# Altium PCB COREV1.1_pcb5_0.PcbDoc (part 10 of 14)
Units mil, origin at the board's own origin, x right, y up, seen from the top; angles counter-clockwise.
Board outline 2860 x 2420 mil, 6 copper layers (Top Layer, GND, SIGNAL_1, SIGNAL_2, POWER, Bottom Layer); 110 components, 241 nets, 882 pads, 697 vias.
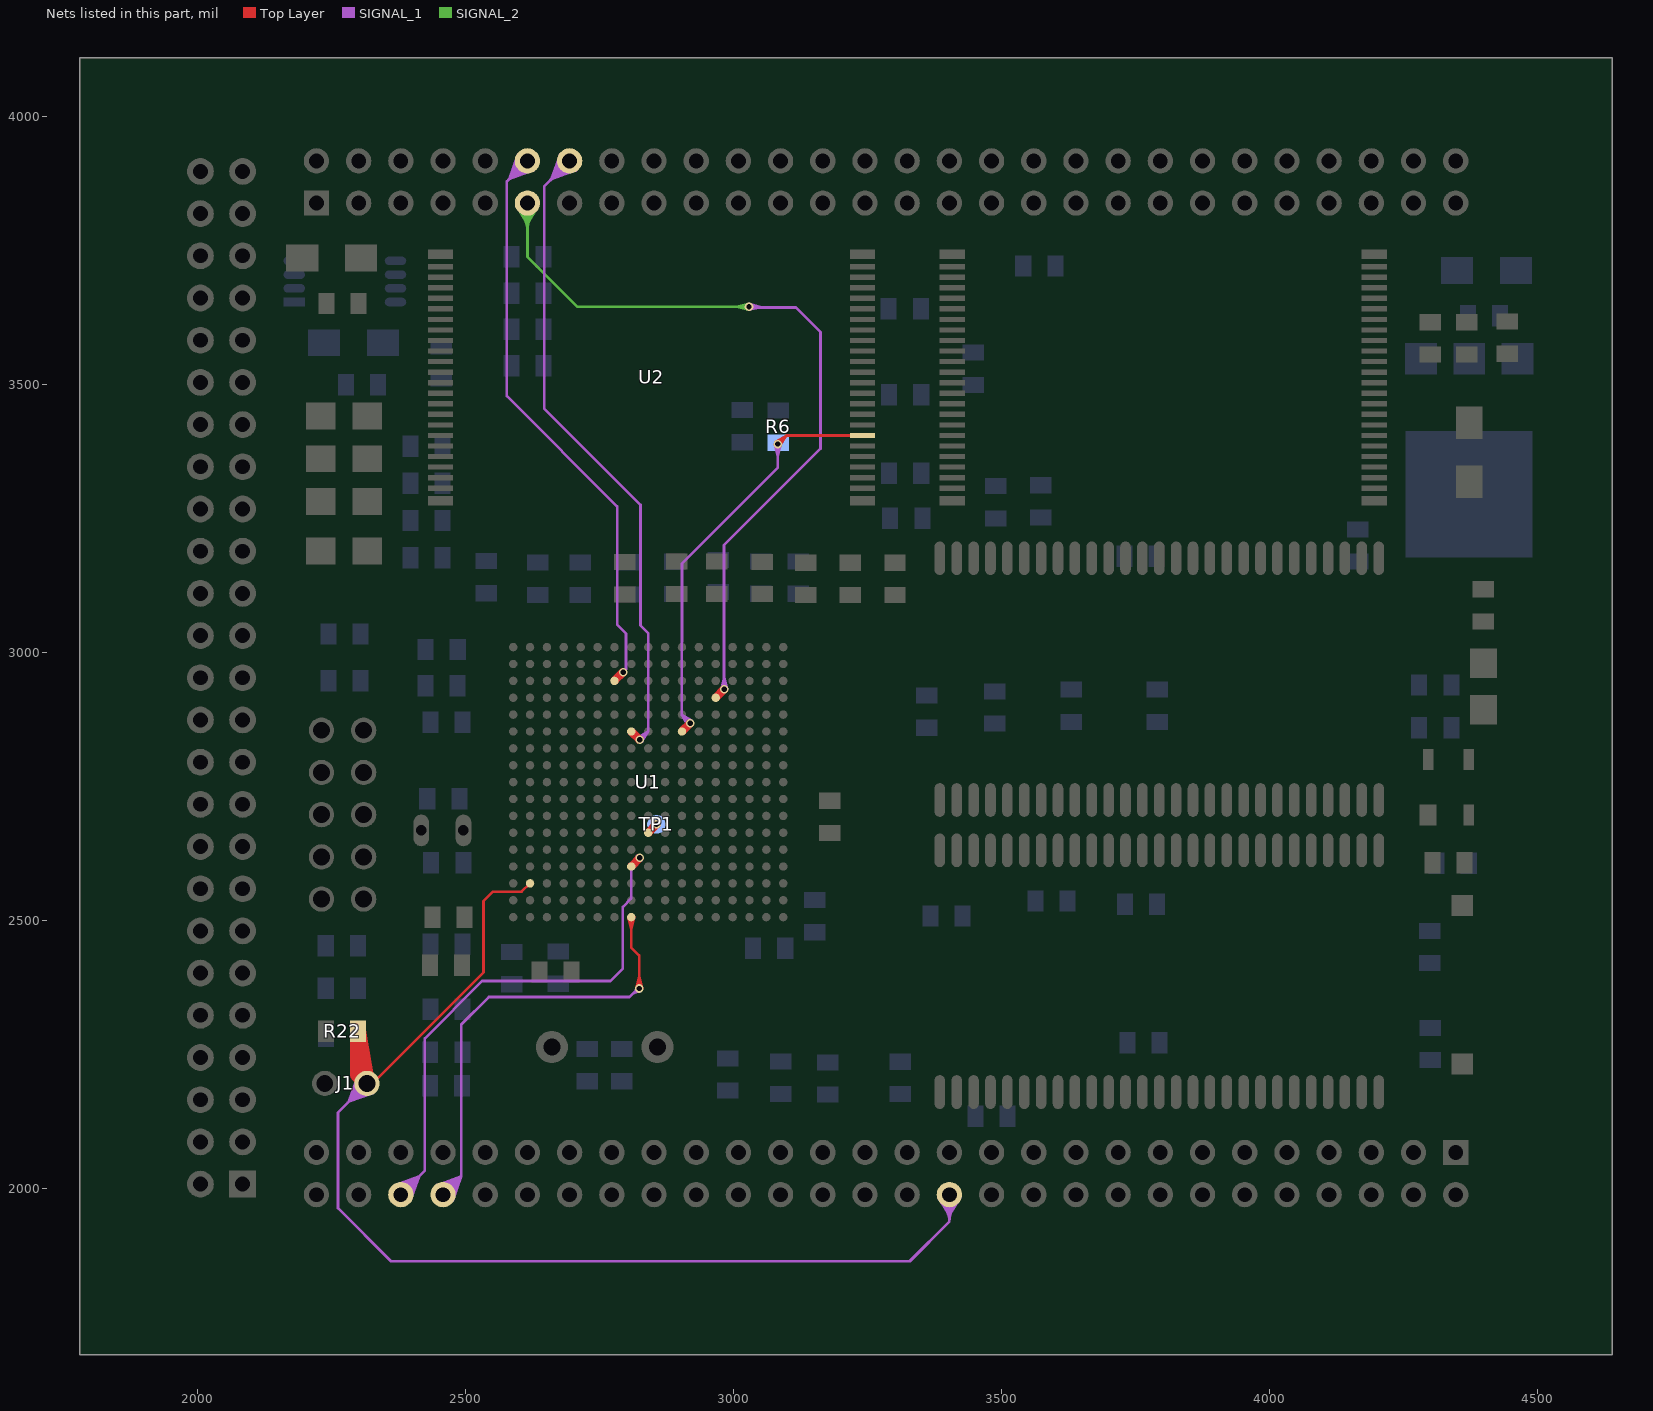
[diagram p14: the nets of this part, all layers, seen from the top]

## Via types
v1: diameter 16, hole 10, Top Layer to Bottom Layer, tented both sides, 638 vias
v2: diameter 30, hole 18, Top Layer to Bottom Layer, tented both sides, 56 vias
v3: diameter 16, hole 10, Top Layer to Bottom Layer, 2 vias
v4: diameter 30, hole 16, Top Layer to Bottom Layer, tented both sides, 1 vias

## Nets (pads, with @x,y where several pads share a name; then routed paths per layer and width w, separated by ;. In a path a pad name is that pad's centre, name@x,y a point inside that pad or via, vN(x,y) a via of type N, cw(c..) or ccw(c..) an arc to the next point about the centre after c; other vN are vias at no path point) (continued)
NWAIT: pad.PC11 U1.E4 | length 2471.3
  Top Layer w5: U1.E4@2966.87,2920.99 ccw(c2966.87,2933.96) 2976.04,2924.79 ccw(c2985.22,2915.61) U1.E4@2972.24,2915.61 ; 2972.93,2921.67 ccw(c2963.1,2931.5) v1@2977,2931.5 ; 2973.55,2922.29 cw(c2982.5,2913.34) v1@2982.5,2926 ; v1@2977.46,2933.7 U1.E4@2971.1,2912.3 ; v1@2978.13,2934.84 U1.E4@2966.87,2915.61 ; v1@2979.06,2935.79 U1.E4@2963.56,2919.85 ; v1@2984.78,2926.5 U1.E4@2963.56,2919.85 ; v1@2985.91,2927.19 U1.E4@2966.87,2915.61 ; v1@2986.85,2928.13 U1.E4@2971.1,2912.3 ; U1.E4@2963.56,2919.85 v1@2982.5,2931.24 ; U1.E4@2963.56,2919.85 v1(2982.5,2931.5) ; U1.E4@2966.87,2915.61 v1@2982.5,2931.24 ; U1.E4@2966.87,2915.61 v1(2982.5,2931.5) ; U1.E4@2971.1,2912.3 v1@2982.5,2931.24 ; U1.E4@2971.1,2912.3 v1(2982.5,2931.5) ; v1@2982.5,2931.24 v1(2982.5,2931.5)
  SIGNAL_1 w5: v1@2977.04,2932.16 2982.5,2954.5 v1@2987.96,2932.16 ; v1@2978.61,2935.39 ccw(c2969.22,2944.78) 2982.5,2944.78 ccw(c2995.78,2944.78) v1@2986.39,2935.39 ; v1@2982.76,2931.5 v1(2982.5,2931.5) 2982.5,3200.5 3162.5,3380.5 3162.5,3598 3116.5,3644 3030,3644 v1(3029,3645) 3052.06,3644 ; v1@3029.42,3639.52 3052.06,3644 ; v1@3029.89,3650.43 3052.06,3644 ; v1@3032.89,3641.11 cw(c3039.86,3634.14) 3039.86,3644 ; v1@3032.89,3648.89 ccw(c3044.69,3660.69) 3044.69,3644
  SIGNAL_2 w5: pad.PC11@2595.18,3832.93 2615.5,3800.09 ; pad.PC11@2599.73,3835.34 2615.5,3800.09 ; pad.PC11@2600.56,3823.77 cw(c2564.5,3787.72) 2615.5,3787.72 cw(c2666.49,3787.72) pad.PC11@2630.43,3823.77 ; pad.PC11@2604.1,3827.31 cw(c2576.57,3799.79) 2615.5,3799.79 cw(c2654.42,3799.79) pad.PC11@2626.9,3827.31 ; pad.PC11@2604.49,3837.11 2615.5,3800.09 ; pad.PC11@2607.63,3830.84 cw(c2588.65,3811.86) 2615.5,3811.86 cw(c2642.35,3811.86) pad.PC11@2623.36,3830.84 ; pad.PC11@2609.39,3838.22 2615.5,3800.09 ; pad.PC11@2615.5,3838.71 2615.5,3738.5 2709,3645 v1(3029,3645) ; pad.PC11@2621.6,3838.22 2615.5,3800.09 ; pad.PC11@2626.5,3837.11 2615.5,3800.09 ; pad.PC11@2631.26,3835.34 2615.5,3800.09 ; pad.PC11@2635.81,3832.93 2615.5,3800.09 ; v1@3025.11,3641.11 ccw(c3015.72,3631.72) 3015.72,3645 ccw(c3015.72,3658.28) v1@3025.11,3648.89 ; v1@3028.34,3639.54 3006,3645 v1@3028.34,3650.46
NXDACK0: pad.PC12 U1.L3 | length 1953.5
  Top Layer w5: U1.L3@2777.89,2952.48 ccw(c2777.89,2965.46) 2787.07,2956.28 ccw(c2796.24,2947.11) U1.L3@2783.27,2947.11 ; 2784.41,2953.63 ccw(c2774.54,2963.5) v1@2788.5,2963.5 ; 2785.1,2954.31 cw(c2794,2945.41) v1@2794,2958 ; v1@2788.98,2965.76 U1.L3@2782.12,2943.78 ; v1@2789.64,2966.86 U1.L3@2777.89,2947.11 ; v1@2790.54,2967.78 U1.L3@2774.57,2951.33 ; v1@2796.34,2958.52 U1.L3@2774.57,2951.33 ; v1@2797.43,2959.2 U1.L3@2777.89,2947.11 ; v1@2798.34,2960.12 U1.L3@2782.12,2943.78 ; U1.L3@2774.57,2951.33 v1@2794,2963.22 ; U1.L3@2774.57,2951.33 v1(2794,2963.5) ; U1.L3@2777.89,2947.11 v1@2794,2963.22 ; U1.L3@2777.89,2947.11 v1(2794,2963.5) ; U1.L3@2782.12,2943.78 v1@2794,2963.22 ; U1.L3@2782.12,2943.78 v1(2794,2963.5)
  SIGNAL_1 w5: pad.PC12@2594.37,3917.45 cw(c2543.38,3917.45) 2579.44,3881.39 cw(c2615.5,3845.33) pad.PC12@2615.5,3896.33 ; pad.PC12@2597.66,3928.77 2581.27,3883.22 ; pad.PC12@2599.37,3917.45 cw(c2560.45,3917.45) 2587.97,3889.93 cw(c2615.5,3862.4) pad.PC12@2615.5,3901.33 ; pad.PC12@2602.36,3926.79 2581.27,3883.22 ; pad.PC12@2604.37,3917.45 cw(c2577.52,3917.45) 2596.51,3898.46 cw(c2615.5,3879.48) pad.PC12@2615.5,3906.33 ; pad.PC12@2606.78,3924.36 2581.27,3883.22 ; pad.PC12@2610.9,3921.49 2581.27,3883.22 ; pad.PC12@2615.5,3917.45 2577,3878.95 2577,3505 2576.98,3478.52 2783,3272.5 2783,3051.94 2799.5,3035.44 2799.5,2969 v1(2794,2963.5) v1@2792.5,2965 ; pad.PC12@2619.54,3912.85 2581.27,3883.22 ; pad.PC12@2622.41,3908.73 2581.27,3883.22 ; pad.PC12@2624.84,3904.31 2581.27,3883.22 ; pad.PC12@2626.81,3899.61 2581.27,3883.22
NXDREQ0: pad.PC14 U1.K6 | length 2129.6
  Top Layer w5: U1.K6@2809.39,2847.25 cw(c2809.39,2834.27) 2818.56,2843.45 cw(c2827.74,2852.62) U1.K6@2814.76,2852.62 ; v1@2819.51,2837 ccw(c2806.23,2837) 2815.62,2846.39 ccw(c2825.01,2855.78) v1@2825.01,2842.5 ; v1@2819.98,2834.77 U1.K6@2813.62,2855.93 ; v1@2820.67,2833.63 U1.K6@2809.39,2852.62 ; v1@2821.61,2832.68 U1.K6@2806.08,2848.39 ; v1@2827.24,2842.03 U1.K6@2806.08,2848.39 ; v1@2828.39,2841.34 U1.K6@2809.39,2852.62 ; v1@2829.34,2840.4 U1.K6@2813.62,2855.93 ; U1.K6@2806.08,2848.39 v1(2825.01,2837) ; U1.K6@2806.08,2848.39 v1(2825.01,2837) ; U1.K6@2809.39,2852.62 v1(2825.01,2837) ; U1.K6@2809.39,2852.62 v1(2825.01,2837) ; U1.K6@2813.62,2855.93 v1(2825.01,2837) ; U1.K6@2813.62,2855.93 v1(2825.01,2837)
  SIGNAL_1 w5: pad.PC14@2673.11,3917.45 cw(c2622.12,3917.45) 2658.18,3881.39 cw(c2694.24,3845.33) pad.PC14@2694.24,3896.33 ; pad.PC14@2676.4,3928.77 2660.01,3883.22 ; pad.PC14@2678.11,3917.45 cw(c2639.19,3917.45) 2666.71,3889.93 cw(c2694.24,3862.4) pad.PC14@2694.24,3901.33 ; pad.PC14@2681.1,3926.79 2660.01,3883.22 ; pad.PC14@2683.11,3917.45 cw(c2656.26,3917.45) 2675.25,3898.46 cw(c2694.24,3879.48) pad.PC14@2694.24,3906.33 ; pad.PC14@2685.52,3924.36 2660.01,3883.22 ; pad.PC14@2689.64,3921.49 2660.01,3883.22 ; pad.PC14@2694.24,3917.45 2646.62,3869.83 2646.62,3455.38 2826.5,3275.5 2826.5,3050.5 2840.77,3036.23 2840.77,2852.76 ; pad.PC14@2698.28,3912.85 2660.01,3883.22 ; pad.PC14@2701.14,3908.73 2660.01,3883.22 ; pad.PC14@2703.58,3904.31 2660.01,3883.22 ; pad.PC14@2705.55,3899.61 2660.01,3883.22 ; v1@2821.63,2841.34 2840.77,2852.76 ; v1(2825.01,2837) 2840.77,2852.76 ; v1@2825.01,2842.5 ccw(c2825.01,2855.78) 2834.4,2846.39 ccw(c2843.79,2837) v1@2830.51,2837 ; v1@2829.35,2833.62 2840.77,2852.76
OM0: J1.1 pad.PA26 R22.2 U1.T15 | length 45726.8
  Top Layer w5: J1.1@2316.05,2195.82 2326.24,2195.82 2533.5,2403.08 2533.5,2536 2551.28,2553.78 2604.78,2553.78 U1.T15@2620.41,2569.16
  Top Layer w30: R22.2@2299.5,2293.41 2299.5,2212.37 J1.1@2316.05,2195.82 ; R22.2@2299.5,2293.41 J1.1@2316.05,2195.82 ; R22.2@2299.5,2293.41 J1.1@2316.05,2195.82 ; R22.2@2299.5,2293.41 J1.1@2316.05,2195.82
  SIGNAL_1 w5: J1.1@2294.93,2195.82 cw(c2243.93,2195.82) 2279.99,2159.76 cw(c2316.05,2123.71) J1.1@2316.05,2174.7 ; J1.1@2299.93,2195.82 cw(c2261,2195.82) 2288.53,2168.3 cw(c2316.05,2140.78) J1.1@2316.05,2179.7 ; J1.1@2304.93,2195.82 cw(c2278.08,2195.82) 2297.06,2176.84 cw(c2316.05,2157.85) J1.1@2316.05,2184.7 ; pad.PA26@3382.58,1982.54 3402.9,1949.69 ; pad.PA26@3387.13,1984.95 3402.9,1949.69 ; pad.PA26@3388.08,1973.26 cw(c3353.29,1937.9) 3402.9,1937.9 ; pad.PA26@3391.59,1976.82 cw(c3365.03,1949.83) 3402.9,1949.83 cw(c3440.76,1949.83) pad.PA26@3414.21,1976.82 ; pad.PA26@3391.89,1986.71 3402.9,1949.69 ; pad.PA26@3395.1,1980.39 cw(c3376.78,1961.77) 3402.9,1961.77 cw(c3429.02,1961.77) pad.PA26@3410.7,1980.39 ; pad.PA26@3396.8,1987.83 3402.9,1949.69 ; pad.PA26@3402.9,1988.32 3402.9,1937.9 ; pad.PA26@3409,1987.83 3402.9,1949.69 ; pad.PA26@3413.9,1986.71 3402.9,1949.69 ; pad.PA26@3417.71,1973.26 ccw(c3452.51,1937.9) 3402.9,1937.9 ; pad.PA26@3418.66,1984.95 3402.9,1949.69 ; pad.PA26@3423.22,1982.54 3402.9,1949.69 ; 2281.82,2161.59 J1.1@2327.37,2177.99 ; 2281.82,2161.59 J1.1@2298.21,2207.14 ; 2281.82,2161.59 J1.1@2325.39,2182.68 ; 2281.82,2161.59 J1.1@2302.91,2205.16 ; 2281.82,2161.59 J1.1@2322.96,2187.11 ; 2281.82,2161.59 J1.1@2307.33,2202.73 ; 2281.82,2161.59 J1.1@2320.09,2191.23 ; 2281.82,2161.59 J1.1@2311.45,2199.87 ; 2281.82,2161.59 J1.1@2327.37,2177.99 ; 2281.82,2161.59 J1.1@2298.21,2207.14 ; 2281.82,2161.59 J1.1@2325.39,2182.68 ; 2281.82,2161.59 J1.1@2302.91,2205.16 ; 2281.82,2161.59 J1.1@2322.96,2187.11 ; 2281.82,2161.59 J1.1@2307.33,2202.73 ; 2281.82,2161.59 J1.1@2320.09,2191.23 ; 2281.82,2161.59 J1.1@2311.45,2199.87 ; 2281.82,2161.59 J1.1@2327.37,2177.99 ; 2281.82,2161.59 J1.1@2298.21,2207.14 ; 2281.82,2161.59 J1.1@2325.39,2182.68 ; 2281.82,2161.59 J1.1@2302.91,2205.16 ; 2281.82,2161.59 J1.1@2322.96,2187.11 ; 2281.82,2161.59 J1.1@2307.33,2202.73 ; 2281.82,2161.59 J1.1@2320.09,2191.23 ; 2281.82,2161.59 J1.1@2311.45,2199.87 ; 2281.82,2161.59 J1.1@2316.05,2195.82 ; 2281.82,2161.59 J1.1@2327.37,2177.99 ; 2281.82,2161.59 J1.1@2298.21,2207.14 ; 2281.82,2161.59 J1.1@2325.39,2182.68 ; 2281.82,2161.59 J1.1@2302.91,2205.16 ; 2281.82,2161.59 J1.1@2322.96,2187.11 ; 2281.82,2161.59 J1.1@2307.33,2202.73 ; 2281.82,2161.59 J1.1@2320.09,2191.23 ; 2281.82,2161.59 J1.1@2311.45,2199.87 ; 2281.82,2161.59 J1.1@2316.05,2195.82 ; 2281.82,2161.59 J1.1@2327.37,2177.99 ; 2281.82,2161.59 J1.1@2298.21,2207.14 ; 2281.82,2161.59 J1.1@2325.39,2182.68 ; 2281.82,2161.59 J1.1@2302.91,2205.16 ; 2281.82,2161.59 J1.1@2322.96,2187.11 ; 2281.82,2161.59 J1.1@2307.33,2202.73 ; 2281.82,2161.59 J1.1@2320.09,2191.23 ; 2281.82,2161.59 J1.1@2311.45,2199.87 ; 2281.82,2161.59 J1.1@2316.05,2195.82 ; 2281.82,2161.59 J1.1@2327.37,2177.99 ; 2281.82,2161.59 J1.1@2298.21,2207.14 ; 2281.82,2161.59 J1.1@2325.39,2182.68 ; 2281.82,2161.59 J1.1@2302.91,2205.16 ; 2281.82,2161.59 J1.1@2322.96,2187.11 ; 2281.82,2161.59 J1.1@2307.33,2202.73 ; 2281.82,2161.59 J1.1@2320.09,2191.23 ; 2281.82,2161.59 J1.1@2311.45,2199.87 ; 2281.82,2161.59 J1.1@2316.05,2195.82 ; 2281.82,2161.59 J1.1@2327.37,2177.99 ; 2281.82,2161.59 J1.1@2298.21,2207.14 ; 2281.82,2161.59 J1.1@2325.39,2182.68 ; 2281.82,2161.59 J1.1@2302.91,2205.16 ; 2281.82,2161.59 J1.1@2322.96,2187.11 ; 2281.82,2161.59 J1.1@2307.33,2202.73 ; 2281.82,2161.59 J1.1@2320.09,2191.23 ; 2281.82,2161.59 J1.1@2311.45,2199.87 ; 2281.82,2161.59 J1.1@2316.05,2195.82 ; 2281.82,2161.59 J1.1@2327.37,2177.99 ; 2281.82,2161.59 J1.1@2298.21,2207.14 ; 2281.82,2161.59 J1.1@2325.39,2182.68 ; 2281.82,2161.59 J1.1@2302.91,2205.16 ; 2281.82,2161.59 J1.1@2322.96,2187.11 ; 2281.82,2161.59 J1.1@2307.33,2202.73 ; 2281.82,2161.59 J1.1@2320.09,2191.23 ; 2281.82,2161.59 J1.1@2311.45,2199.87 ; 2281.82,2161.59 J1.1@2316.05,2195.82 ; 2281.82,2161.59 J1.1@2327.37,2177.99 ; 2281.82,2161.59 J1.1@2298.21,2207.14 ; 2281.82,2161.59 J1.1@2325.39,2182.68 ; 2281.82,2161.59 J1.1@2302.91,2205.16 ; 2281.82,2161.59 J1.1@2322.96,2187.11 ; 2281.82,2161.59 J1.1@2307.33,2202.73 ; 2281.82,2161.59 J1.1@2320.09,2191.23 ; 2281.82,2161.59 J1.1@2311.45,2199.87 ; 2281.82,2161.59 J1.1@2316.05,2195.82 ; 2281.82,2161.59 J1.1@2327.37,2177.99 ; 2281.82,2161.59 J1.1@2298.21,2207.14 ; 2281.82,2161.59 J1.1@2325.39,2182.68 ; 2281.82,2161.59 J1.1@2302.91,2205.16 ; 2281.82,2161.59 J1.1@2322.96,2187.11 ; 2281.82,2161.59 J1.1@2307.33,2202.73 ; 2281.82,2161.59 J1.1@2320.09,2191.23 ; 2281.82,2161.59 J1.1@2311.45,2199.87 ; 2281.82,2161.59 J1.1@2316.05,2195.82 ; 2281.82,2161.59 J1.1@2327.37,2177.99 ; 2281.82,2161.59 J1.1@2298.21,2207.14 ; 2281.82,2161.59 J1.1@2325.39,2182.68 ; 2281.82,2161.59 J1.1@2302.91,2205.16 ; 2281.82,2161.59 J1.1@2322.96,2187.11 ; 2281.82,2161.59 J1.1@2307.33,2202.73 ; 2281.82,2161.59 J1.1@2320.09,2191.23 ; 2281.82,2161.59 J1.1@2311.45,2199.87 ; 2281.82,2161.59 J1.1@2327.37,2177.99 ; 2281.82,2161.59 J1.1@2298.21,2207.14 ; 2281.82,2161.59 J1.1@2325.39,2182.68 ; 2281.82,2161.59 J1.1@2302.91,2205.16 ; 2281.82,2161.59 J1.1@2322.96,2187.11 ; 2281.82,2161.59 J1.1@2307.33,2202.73 ; 2281.82,2161.59 J1.1@2320.09,2191.23 ; 2281.82,2161.59 J1.1@2311.45,2199.87 ; 2281.82,2161.59 J1.1@2316.05,2195.82 ; 2281.82,2161.59 J1.1@2327.37,2177.99 ; 2281.82,2161.59 J1.1@2298.21,2207.14 ; 2281.82,2161.59 J1.1@2325.39,2182.68 ; 2281.82,2161.59 J1.1@2302.91,2205.16 ; 2281.82,2161.59 J1.1@2322.96,2187.11 ; 2281.82,2161.59 J1.1@2307.33,2202.73 ; 2281.82,2161.59 J1.1@2320.09,2191.23 ; 2281.82,2161.59 J1.1@2311.45,2199.87 ; 2281.82,2161.59 J1.1@2316.05,2195.82 ; 2281.82,2161.59 J1.1@2327.37,2177.99 ; 2281.82,2161.59 J1.1@2298.21,2207.14 ; 2281.82,2161.59 J1.1@2325.39,2182.68 ; 2281.82,2161.59 J1.1@2302.91,2205.16 ; 2281.82,2161.59 J1.1@2322.96,2187.11 ; 2281.82,2161.59 J1.1@2307.33,2202.73 ; 2281.82,2161.59 J1.1@2320.09,2191.23 ; 2281.82,2161.59 J1.1@2311.45,2199.87 ; 2281.82,2161.59 J1.1@2316.05,2195.82 ; 2281.82,2161.59 J1.1@2327.37,2177.99 ; 2281.82,2161.59 J1.1@2298.21,2207.14 ; 2281.82,2161.59 J1.1@2325.39,2182.68 ; 2281.82,2161.59 J1.1@2302.91,2205.16 ; 2281.82,2161.59 J1.1@2322.96,2187.11 ; 2281.82,2161.59 J1.1@2307.33,2202.73 ; 2281.82,2161.59 J1.1@2320.09,2191.23 ; 2281.82,2161.59 J1.1@2311.45,2199.87 ; 2281.82,2161.59 J1.1@2316.05,2195.82 ; 2281.82,2161.59 J1.1@2327.37,2177.99 ; 2281.82,2161.59 J1.1@2298.21,2207.14 ; 2281.82,2161.59 J1.1@2325.39,2182.68 ; 2281.82,2161.59 J1.1@2302.91,2205.16 ; 2281.82,2161.59 J1.1@2322.96,2187.11 ; 2281.82,2161.59 J1.1@2307.33,2202.73 ; 2281.82,2161.59 J1.1@2320.09,2191.23 ; 2281.82,2161.59 J1.1@2311.45,2199.87 ; 2281.82,2161.59 J1.1@2316.05,2195.82 ; 2281.82,2161.59 J1.1@2327.37,2177.99 ; 2281.82,2161.59 J1.1@2298.21,2207.14 ; 2281.82,2161.59 J1.1@2325.39,2182.68 ; 2281.82,2161.59 J1.1@2302.91,2205.16 ; 2281.82,2161.59 J1.1@2322.96,2187.11 ; 2281.82,2161.59 J1.1@2307.33,2202.73 ; 2281.82,2161.59 J1.1@2320.09,2191.23 ; 2281.82,2161.59 J1.1@2311.45,2199.87 ; 2281.82,2161.59 J1.1@2316.05,2195.82 ; 2281.82,2161.59 J1.1@2327.37,2177.99 ; 2281.82,2161.59 J1.1@2298.21,2207.14 ; 2281.82,2161.59 J1.1@2325.39,2182.68 ; 2281.82,2161.59 J1.1@2302.91,2205.16 ; 2281.82,2161.59 J1.1@2322.96,2187.11 ; 2281.82,2161.59 J1.1@2307.33,2202.73 ; 2281.82,2161.59 J1.1@2320.09,2191.23 ; 2281.82,2161.59 J1.1@2311.45,2199.87 ; 2281.82,2161.59 J1.1@2316.05,2195.82 ; 2281.82,2161.59 J1.1@2327.37,2177.99 ; 2281.82,2161.59 J1.1@2298.21,2207.14 ; 2281.82,2161.59 J1.1@2325.39,2182.68 ; 2281.82,2161.59 J1.1@2302.91,2205.16 ; 2281.82,2161.59 J1.1@2322.96,2187.11 ; 2281.82,2161.59 J1.1@2307.33,2202.73 ; 2281.82,2161.59 J1.1@2320.09,2191.23 ; 2281.82,2161.59 J1.1@2311.45,2199.87 ; 2281.82,2161.59 J1.1@2316.05,2195.82 ; 2281.82,2161.59 J1.1@2327.37,2177.99 ; 2281.82,2161.59 J1.1@2298.21,2207.14 ; 2281.82,2161.59 J1.1@2325.39,2182.68 ; 2281.82,2161.59 J1.1@2302.91,2205.16 ; 2281.82,2161.59 J1.1@2322.96,2187.11 ; 2281.82,2161.59 J1.1@2307.33,2202.73 ; 2281.82,2161.59 J1.1@2320.09,2191.23 ; 2281.82,2161.59 J1.1@2311.45,2199.87 ; 2281.82,2161.59 J1.1@2316.05,2195.82 ; 2281.82,2161.59 J1.1@2327.37,2177.99 ; 2281.82,2161.59 J1.1@2298.21,2207.14 ; 2281.82,2161.59 J1.1@2325.39,2182.68 ; 2281.82,2161.59 J1.1@2302.91,2205.16 ; 2281.82,2161.59 J1.1@2322.96,2187.11 ; 2281.82,2161.59 J1.1@2307.33,2202.73 ; 2281.82,2161.59 J1.1@2320.09,2191.23 ; 2281.82,2161.59 J1.1@2311.45,2199.87 ; 2281.82,2161.59 J1.1@2316.05,2195.82 ; 2281.82,2161.59 J1.1@2327.37,2177.99 ; 2281.82,2161.59 J1.1@2298.21,2207.14 ; 2281.82,2161.59 J1.1@2325.39,2182.68 ; 2281.82,2161.59 J1.1@2302.91,2205.16 ; 2281.82,2161.59 J1.1@2322.96,2187.11 ; 2281.82,2161.59 J1.1@2307.33,2202.73 ; 2281.82,2161.59 J1.1@2320.09,2191.23 ; 2281.82,2161.59 J1.1@2311.45,2199.87 ; 2281.82,2161.59 J1.1@2316.05,2195.82 ; 2281.82,2161.59 J1.1@2327.37,2177.99 ; 2281.82,2161.59 J1.1@2298.21,2207.14 ; 2281.82,2161.59 J1.1@2325.39,2182.68 ; 2281.82,2161.59 J1.1@2302.91,2205.16 ; 2281.82,2161.59 J1.1@2322.96,2187.11 ; 2281.82,2161.59 J1.1@2307.33,2202.73 ; 2281.82,2161.59 J1.1@2320.09,2191.23 ; 2281.82,2161.59 J1.1@2311.45,2199.87 ; 2281.82,2161.59 J1.1@2316.05,2195.82 ; 2281.82,2161.59 J1.1@2327.37,2177.99 ; 2281.82,2161.59 J1.1@2298.21,2207.14 ; 2281.82,2161.59 J1.1@2325.39,2182.68 ; 2281.82,2161.59 J1.1@2302.91,2205.16 ; 2281.82,2161.59 J1.1@2322.96,2187.11 ; 2281.82,2161.59 J1.1@2307.33,2202.73 ; 2281.82,2161.59 J1.1@2320.09,2191.23 ; 2281.82,2161.59 J1.1@2311.45,2199.87 ; 2281.82,2161.59 J1.1@2327.37,2177.99 ; 2281.82,2161.59 J1.1@2298.21,2207.14 ; 2281.82,2161.59 J1.1@2325.39,2182.68 ; 2281.82,2161.59 J1.1@2302.91,2205.16 ; 2281.82,2161.59 J1.1@2322.96,2187.11 ; 2281.82,2161.59 J1.1@2307.33,2202.73 ; 2281.82,2161.59 J1.1@2320.09,2191.23 ; 2281.82,2161.59 J1.1@2311.45,2199.87 ; 2281.82,2161.59 J1.1@2316.05,2195.82 ; 2281.82,2161.59 J1.1@2327.37,2177.99 ; 2281.82,2161.59 J1.1@2298.21,2207.14 ; 2281.82,2161.59 J1.1@2325.39,2182.68 ; 2281.82,2161.59 J1.1@2302.91,2205.16 ; 2281.82,2161.59 J1.1@2322.96,2187.11 ; 2281.82,2161.59 J1.1@2307.33,2202.73 ; 2281.82,2161.59 J1.1@2320.09,2191.23 ; 2281.82,2161.59 J1.1@2311.45,2199.87 ; 2281.82,2161.59 J1.1@2316.05,2195.82 ; 2281.82,2161.59 J1.1@2327.37,2177.99 ; 2281.82,2161.59 J1.1@2298.21,2207.14 ; 2281.82,2161.59 J1.1@2325.39,2182.68 ; 2281.82,2161.59 J1.1@2302.91,2205.16 ; 2281.82,2161.59 J1.1@2322.96,2187.11 ; 2281.82,2161.59 J1.1@2307.33,2202.73 ; 2281.82,2161.59 J1.1@2320.09,2191.23 ; 2281.82,2161.59 J1.1@2311.45,2199.87 ; 2281.82,2161.59 J1.1@2316.05,2195.82 ; 2281.82,2161.59 J1.1@2327.37,2177.99 ; 2281.82,2161.59 J1.1@2298.21,2207.14 ; 2281.82,2161.59 J1.1@2325.39,2182.68 ; 2281.82,2161.59 J1.1@2302.91,2205.16 ; 2281.82,2161.59 J1.1@2322.96,2187.11 ; 2281.82,2161.59 J1.1@2307.33,2202.73 ; 2281.82,2161.59 J1.1@2320.09,2191.23 ; 2281.82,2161.59 J1.1@2311.45,2199.87 ; 2281.82,2161.59 J1.1@2316.05,2195.82 ; 2281.82,2161.59 J1.1@2327.37,2177.99 ; 2281.82,2161.59 J1.1@2298.21,2207.14 ; 2281.82,2161.59 J1.1@2325.39,2182.68 ; 2281.82,2161.59 J1.1@2302.91,2205.16 ; 2281.82,2161.59 J1.1@2322.96,2187.11 ; 2281.82,2161.59 J1.1@2307.33,2202.73 ; 2281.82,2161.59 J1.1@2320.09,2191.23 ; 2281.82,2161.59 J1.1@2311.45,2199.87 ; 2281.82,2161.59 J1.1@2327.37,2177.99 ; 2281.82,2161.59 J1.1@2298.21,2207.14 ; 2281.82,2161.59 J1.1@2325.39,2182.68 ; 2281.82,2161.59 J1.1@2302.91,2205.16 ; 2281.82,2161.59 J1.1@2322.96,2187.11 ; 2281.82,2161.59 J1.1@2307.33,2202.73 ; 2281.82,2161.59 J1.1@2320.09,2191.23 ; 2281.82,2161.59 J1.1@2311.45,2199.87 ; 2281.82,2161.59 J1.1@2316.05,2195.82 ; 2281.82,2161.59 J1.1@2327.37,2177.99 ; 2281.82,2161.59 J1.1@2298.21,2207.14 ; 2281.82,2161.59 J1.1@2325.39,2182.68 ; 2281.82,2161.59 J1.1@2302.91,2205.16 ; 2281.82,2161.59 J1.1@2322.96,2187.11 ; 2281.82,2161.59 J1.1@2307.33,2202.73 ; 2281.82,2161.59 J1.1@2320.09,2191.23 ; 2281.82,2161.59 J1.1@2311.45,2199.87 ; 2281.82,2161.59 J1.1@2316.05,2195.82 ; 2281.82,2161.59 J1.1@2327.37,2177.99 ; 2281.82,2161.59 J1.1@2298.21,2207.14 ; 2281.82,2161.59 J1.1@2325.39,2182.68 ; 2281.82,2161.59 J1.1@2302.91,2205.16 ; 2281.82,2161.59 J1.1@2322.96,2187.11 ; 2281.82,2161.59 J1.1@2307.33,2202.73 ; 2281.82,2161.59 J1.1@2320.09,2191.23 ; 2281.82,2161.59 J1.1@2311.45,2199.87 ; 2281.82,2161.59 J1.1@2316.05,2195.82 ; 2281.82,2161.59 J1.1@2327.37,2177.99 ; 2281.82,2161.59 J1.1@2298.21,2207.14 ; 2281.82,2161.59 J1.1@2325.39,2182.68 ; 2281.82,2161.59 J1.1@2302.91,2205.16 ; 2281.82,2161.59 J1.1@2322.96,2187.11 ; 2281.82,2161.59 J1.1@2307.33,2202.73 ; 2281.82,2161.59 J1.1@2320.09,2191.23 ; 2281.82,2161.59 J1.1@2311.45,2199.87 ; 2281.82,2161.59 J1.1@2316.05,2195.82 ; 2281.82,2161.59 J1.1@2327.37,2177.99 ; 2281.82,2161.59 J1.1@2298.21,2207.14 ; 2281.82,2161.59 J1.1@2325.39,2182.68 ; 2281.82,2161.59 J1.1@2302.91,2205.16 ; 2281.82,2161.59 J1.1@2322.96,2187.11 ; 2281.82,2161.59 J1.1@2307.33,2202.73 ; 2281.82,2161.59 J1.1@2320.09,2191.23 ; 2281.82,2161.59 J1.1@2311.45,2199.87 ; 2281.82,2161.59 J1.1@2327.37,2177.99 ; 2281.82,2161.59 J1.1@2298.21,2207.14 ; 2281.82,2161.59 J1.1@2325.39,2182.68 ; 2281.82,2161.59 J1.1@2302.91,2205.16 ; 2281.82,2161.59 J1.1@2322.96,2187.11 ; 2281.82,2161.59 J1.1@2307.33,2202.73 ; 2281.82,2161.59 J1.1@2320.09,2191.23 ; 2281.82,2161.59 J1.1@2311.45,2199.87 ; 2281.82,2161.59 J1.1@2316.05,2195.82 ; 2281.82,2161.59 J1.1@2327.37,2177.99 ; 2281.82,2161.59 J1.1@2298.21,2207.14 ; 2281.82,2161.59 J1.1@2325.39,2182.68 ; 2281.82,2161.59 J1.1@2302.91,2205.16 ; 2281.82,2161.59 J1.1@2322.96,2187.11 ; 2281.82,2161.59 J1.1@2307.33,2202.73 ; 2281.82,2161.59 J1.1@2320.09,2191.23 ; 2281.82,2161.59 J1.1@2311.45,2199.87 ; 2281.82,2161.59 J1.1@2316.05,2195.82 ; 2281.82,2161.59 J1.1@2327.37,2177.99 ; 2281.82,2161.59 J1.1@2298.21,2207.14 ; 2281.82,2161.59 J1.1@2325.39,2182.68 ; 2281.82,2161.59 J1.1@2302.91,2205.16 ; 2281.82,2161.59 J1.1@2322.96,2187.11 ; 2281.82,2161.59 J1.1@2307.33,2202.73 ; 2281.82,2161.59 J1.1@2320.09,2191.23 ; 2281.82,2161.59 J1.1@2311.45,2199.87 ; 2281.82,2161.59 J1.1@2316.05,2195.82 ; 2281.82,2161.59 J1.1@2327.37,2177.99 ; 2281.82,2161.59 J1.1@2298.21,2207.14 ; 2281.82,2161.59 J1.1@2325.39,2182.68 ; 2281.82,2161.59 J1.1@2302.91,2205.16 ; 2281.82,2161.59 J1.1@2322.96,2187.11 ; 2281.82,2161.59 J1.1@2307.33,2202.73 ; 2281.82,2161.59 J1.1@2320.09,2191.23 ; 2281.82,2161.59 J1.1@2311.45,2199.87 ; 2281.82,2161.59 J1.1@2316.05,2195.82 ; 2281.82,2161.59 J1.1@2327.37,2177.99 ; 2281.82,2161.59 J1.1@2298.21,2207.14 ; 2281.82,2161.59 J1.1@2325.39,2182.68 ; 2281.82,2161.59 J1.1@2302.91,2205.16 ; 2281.82,2161.59 J1.1@2322.96,2187.11 ; 2281.82,2161.59 J1.1@2307.33,2202.73 ; 2281.82,2161.59 J1.1@2320.09,2191.23 ; 2281.82,2161.59 J1.1@2311.45,2199.87 ; 2281.82,2161.59 J1.1@2327.37,2177.99 ; 2281.82,2161.59 J1.1@2298.21,2207.14 ; 2281.82,2161.59 J1.1@2325.39,2182.68 ; 2281.82,2161.59 J1.1@2302.91,2205.16 ; 2281.82,2161.59 J1.1@2322.96,2187.11 ; 2281.82,2161.59 J1.1@2307.33,2202.73 ; 2281.82,2161.59 J1.1@2320.09,2191.23 ; 2281.82,2161.59 J1.1@2311.45,2199.87 ; 2281.82,2161.59 J1.1@2316.05,2195.82 ; 2281.82,2161.59 J1.1@2327.37,2177.99 ; 2281.82,2161.59 J1.1@2298.21,2207.14 ; 2281.82,2161.59 J1.1@2325.39,2182.68 ; 2281.82,2161.59 J1.1@2302.91,2205.16 ; 2281.82,2161.59 J1.1@2322.96,2187.11 ; 2281.82,2161.59 J1.1@2307.33,2202.73 ; 2281.82,2161.59 J1.1@2320.09,2191.23 ; 2281.82,2161.59 J1.1@2311.45,2199.87 ; 2281.82,2161.59 J1.1@2316.05,2195.82 ; 2281.82,2161.59 J1.1@2327.37,2177.99 ; 2281.82,2161.59 J1.1@2298.21,2207.14 ; 2281.82,2161.59 J1.1@2325.39,2182.68 ; 2281.82,2161.59 J1.1@2302.91,2205.16 ; 2281.82,2161.59 J1.1@2322.96,2187.11 ; 2281.82,2161.59 J1.1@2307.33,2202.73 ; 2281.82,2161.59 J1.1@2320.09,2191.23 ; 2281.82,2161.59 J1.1@2311.45,2199.87 ; 2281.82,2161.59 J1.1@2316.05,2195.82 ; 2281.82,2161.59 J1.1@2327.37,2177.99 ; 2281.82,2161.59 J1.1@2298.21,2207.14 ; 2281.82,2161.59 J1.1@2325.39,2182.68 ; 2281.82,2161.59 J1.1@2302.91,2205.16 ; 2281.82,2161.59 J1.1@2322.96,2187.11 ; 2281.82,2161.59 J1.1@2307.33,2202.73 ; 2281.82,2161.59 J1.1@2320.09,2191.23 ; 2281.82,2161.59 J1.1@2311.45,2199.87 ; 2281.82,2161.59 J1.1@2316.05,2195.82 ; 2281.82,2161.59 J1.1@2327.37,2177.99 ; 2281.82,2161.59 J1.1@2298.21,2207.14 ; 2281.82,2161.59 J1.1@2325.39,2182.68 ; 2281.82,2161.59 J1.1@2302.91,2205.16 ; 2281.82,2161.59 J1.1@2322.96,2187.11 ; 2281.82,2161.59 J1.1@2307.33,2202.73 ; 2281.82,2161.59 J1.1@2320.09,2191.23 ; 2281.82,2161.59 J1.1@2311.45,2199.87 ; 2281.82,2161.59 J1.1@2327.37,2177.99 ; 2281.82,2161.59 J1.1@2298.21,2207.14 ; 2281.82,2161.59 J1.1@2325.39,2182.68 ; 2281.82,2161.59 J1.1@2302.91,2205.16 ; 2281.82,2161.59 J1.1@2322.96,2187.11 ; 2281.82,2161.59 J1.1@2307.33,2202.73 ; 2281.82,2161.59 J1.1@2320.09,2191.23 ; 2281.82,2161.59 J1.1@2311.45,2199.87 ; 2281.82,2161.59 J1.1@2316.05,2195.82 ; 2281.82,2161.59 J1.1@2327.37,2177.99 ; 2281.82,2161.59 J1.1@2298.21,2207.14 ; 2281.82,2161.59 J1.1@2325.39,2182.68 ; 2281.82,2161.59 J1.1@2302.91,2205.16 ; 2281.82,2161.59 J1.1@2322.96,2187.11 ; 2281.82,2161.59 J1.1@2307.33,2202.73 ; 2281.82,2161.59 J1.1@2320.09,2191.23 ; 2281.82,2161.59 J1.1@2311.45,2199.87 ; 2281.82,2161.59 J1.1@2316.05,2195.82 ; 2281.82,2161.59 J1.1@2327.37,2177.99 ; 2281.82,2161.59 J1.1@2298.21,2207.14 ; 2281.82,2161.59 J1.1@2325.39,2182.68 ; 2281.82,2161.59 J1.1@2302.91,2205.16 ; 2281.82,2161.59 J1.1@2322.96,2187.11 ; 2281.82,2161.59 J1.1@2307.33,2202.73 ; 2281.82,2161.59 J1.1@2320.09,2191.23 ; 2281.82,2161.59 J1.1@2311.45,2199.87 ; 2281.82,2161.59 J1.1@2316.05,2195.82 ; 2281.82,2161.59 J1.1@2327.37,2177.99 ; 2281.82,2161.59 J1.1@2298.21,2207.14 ; 2281.82,2161.59 J1.1@2325.39,2182.68 ; 2281.82,2161.59 J1.1@2302.91,2205.16 ; 2281.82,2161.59 J1.1@2322.96,2187.11 ; 2281.82,2161.59 J1.1@2307.33,2202.73 ; 2281.82,2161.59 J1.1@2320.09,2191.23 ; 2281.82,2161.59 J1.1@2311.45,2199.87 ; 2281.82,2161.59 J1.1@2316.05,2195.82 ; 2281.82,2161.59 J1.1@2327.37,2177.99 ; 2281.82,2161.59 J1.1@2298.21,2207.14 ; 2281.82,2161.59 J1.1@2325.39,2182.68 ; 2281.82,2161.59 J1.1@2302.91,2205.16 ; 2281.82,2161.59 J1.1@2322.96,2187.11 ; 2281.82,2161.59 J1.1@2307.33,2202.73 ; 2281.82,2161.59 J1.1@2320.09,2191.23 ; 2281.82,2161.59 J1.1@2311.45,2199.87 ; 2281.82,2161.59 J1.1@2327.37,2177.99 ; 2281.82,2161.59 J1.1@2298.21,2207.14 ; 2281.82,2161.59 J1.1@2325.39,2182.68 ; 2281.82,2161.59 J1.1@2302.91,2205.16 ; 2281.82,2161.59 J1.1@2322.96,2187.11 ; 2281.82,2161.59 J1.1@2307.33,2202.73 ; 2281.82,2161.59 J1.1@2320.09,2191.23 ; 2281.82,2161.59 J1.1@2311.45,2199.87 ; 2281.82,2161.59 J1.1@2316.05,2195.82 ; 2281.82,2161.59 J1.1@2327.37,2177.99 ; 2281.82,2161.59 J1.1@2298.21,2207.14 ; 2281.82,2161.59 J1.1@2325.39,2182.68 ; 2281.82,2161.59 J1.1@2302.91,2205.16 ; 2281.82,2161.59 J1.1@2322.96,2187.11 ; 2281.82,2161.59 J1.1@2307.33,2202.73 ; 2281.82,2161.59 J1.1@2320.09,2191.23 ; 2281.82,2161.59 J1.1@2311.45,2199.87 ; 2281.82,2161.59 J1.1@2316.05,2195.82 ; 2281.82,2161.59 J1.1@2327.37,2177.99 ; 2281.82,2161.59 J1.1@2298.21,2207.14 ; 2281.82,2161.59 J1.1@2325.39,2182.68 ; 2281.82,2161.59 J1.1@2302.91,2205.16 ; 2281.82,2161.59 J1.1@2322.96,2187.11 ; 2281.82,2161.59 J1.1@2307.33,2202.73 ; 2281.82,2161.59 J1.1@2320.09,2191.23 ; 2281.82,2161.59 J1.1@2311.45,2199.87 ; 2281.82,2161.59 J1.1@2316.05,2195.82 ; 2281.82,2161.59 J1.1@2327.37,2177.99 ; 2281.82,2161.59 J1.1@2298.21,2207.14 ; 2281.82,2161.59 J1.1@2325.39,2182.68 ; 2281.82,2161.59 J1.1@2302.91,2205.16 ; 2281.82,2161.59 J1.1@2322.96,2187.11 ; 2281.82,2161.59 J1.1@2307.33,2202.73 ; 2281.82,2161.59 J1.1@2320.09,2191.23 ; 2281.82,2161.59 J1.1@2311.45,2199.87 ; 2281.82,2161.59 J1.1@2316.05,2195.82 ; 2281.82,2161.59 J1.1@2327.37,2177.99 ; 2281.82,2161.59 J1.1@2298.21,2207.14 ; 2281.82,2161.59 J1.1@2325.39,2182.68 ; 2281.82,2161.59 J1.1@2302.91,2205.16 ; 2281.82,2161.59 J1.1@2322.96,2187.11 ; 2281.82,2161.59 J1.1@2307.33,2202.73 ; 2281.82,2161.59 J1.1@2320.09,2191.23 ; 2281.82,2161.59 J1.1@2311.45,2199.87 ; 2281.82,2161.59 J1.1@2327.37,2177.99 ; 2281.82,2161.59 J1.1@2298.21,2207.14 ; 2281.82,2161.59 J1.1@2325.39,2182.68 ; 2281.82,2161.59 J1.1@2302.91,2205.16 ; 2281.82,2161.59 J1.1@2322.96,2187.11 ; 2281.82,2161.59 J1.1@2307.33,2202.73 ; 2281.82,2161.59 J1.1@2320.09,2191.23 ; 2281.82,2161.59 J1.1@2311.45,2199.87 ; 2281.82,2161.59 J1.1@2316.05,2195.82 ; 2281.82,2161.59 J1.1@2327.37,2177.99 ; 2281.82,2161.59 J1.1@2298.21,2207.14 ; 2281.82,2161.59 J1.1@2325.39,2182.68 ; 2281.82,2161.59 J1.1@2302.91,2205.16 ; 2281.82,2161.59 J1.1@2322.96,2187.11 ; 2281.82,2161.59 J1.1@2307.33,2202.73 ; 2281.82,2161.59 J1.1@2320.09,2191.23 ; 2281.82,2161.59 J1.1@2311.45,2199.87 ; 2281.82,2161.59 J1.1@2316.05,2195.82 ; 2281.82,2161.59 J1.1@2327.37,2177.99 ; 2281.82,2161.59 J1.1@2298.21,2207.14 ; 2281.82,2161.59 J1.1@2325.39,2182.68 ; 2281.82,2161.59 J1.1@2302.91,2205.16 ; 2281.82,2161.59 J1.1@2322.96,2187.11 ; 2281.82,2161.59 J1.1@2307.33,2202.73 ; 2281.82,2161.59 J1.1@2320.09,2191.23 ; 2281.82,2161.59 J1.1@2311.45,2199.87 ; 2281.82,2161.59 J1.1@2316.05,2195.82 ; 2281.82,2161.59 J1.1@2327.37,2177.99 ; 2281.82,2161.59 J1.1@2298.21,2207.14 ; 2281.82,2161.59 J1.1@2325.39,2182.68 ; 2281.82,2161.59 J1.1@2302.91,2205.16 ; 2281.82,2161.59 J1.1@2322.96,2187.11 ; 2281.82,2161.59 J1.1@2307.33,2202.73 ; 2281.82,2161.59 J1.1@2320.09,2191.23 ; 2281.82,2161.59 J1.1@2311.45,2199.87 ; 2281.82,2161.59 J1.1@2316.05,2195.82 ; 2281.82,2161.59 J1.1@2327.37,2177.99 ; 2281.82,2161.59 J1.1@2298.21,2207.14 ; 2281.82,2161.59 J1.1@2325.39,2182.68 ; 2281.82,2161.59 J1.1@2302.91,2205.16 ; 2281.82,2161.59 J1.1@2322.96,2187.11 ; 2281.82,2161.59 J1.1@2307.33,2202.73 ; 2281.82,2161.59 J1.1@2320.09,2191.23 ; 2281.82,2161.59 J1.1@2311.45,2199.87 ; 2281.82,2161.59 J1.1@2327.37,2177.99 ; 2281.82,2161.59 J1.1@2298.21,2207.14 ; 2281.82,2161.59 J1.1@2325.39,2182.68 ; 2281.82,2161.59 J1.1@2302.91,2205.16 ; 2281.82,2161.59 J1.1@2322.96,2187.11 ; 2281.82,2161.59 J1.1@2307.33,2202.73 ; 2281.82,2161.59 J1.1@2320.09,2191.23 ; 2281.82,2161.59 J1.1@2311.45,2199.87 ; 2281.82,2161.59 J1.1@2316.05,2195.82 ; 2281.82,2161.59 J1.1@2327.37,2177.99 ; 2281.82,2161.59 J1.1@2298.21,2207.14 ; 2281.82,2161.59 J1.1@2325.39,2182.68 ; 2281.82,2161.59 J1.1@2302.91,2205.16 ; 2281.82,2161.59 J1.1@2322.96,2187.11 ; 2281.82,2161.59 J1.1@2307.33,2202.73 ; 2281.82,2161.59 J1.1@2320.09,2191.23 ; 2281.82,2161.59 J1.1@2311.45,2199.87 ; 2281.82,2161.59 J1.1@2316.05,2195.82 ; 2281.82,2161.59 J1.1@2327.37,2177.99 ; 2281.82,2161.59 J1.1@2298.21,2207.14 ; 2281.82,2161.59 J1.1@2325.39,2182.68 ; 2281.82,2161.59 J1.1@2302.91,2205.16 ; 2281.82,2161.59 J1.1@2322.96,2187.11 ; 2281.82,2161.59 J1.1@2307.33,2202.73 ; 2281.82,2161.59 J1.1@2320.09,2191.23 ; 2281.82,2161.59 J1.1@2311.45,2199.87 ; 2281.82,2161.59 J1.1@2316.05,2195.82 ; 2281.82,2161.59 J1.1@2327.37,2177.99 ; 2281.82,2161.59 J1.1@2298.21,2207.14 ; 2281.82,2161.59 J1.1@2325.39,2182.68 ; 2281.82,2161.59 J1.1@2302.91,2205.16 ; 2281.82,2161.59 J1.1@2322.96,2187.11 ; 2281.82,2161.59 J1.1@2307.33,2202.73 ; 2281.82,2161.59 J1.1@2320.09,2191.23 ; 2281.82,2161.59 J1.1@2311.45,2199.87 ; 2281.82,2161.59 J1.1@2316.05,2195.82 ; 2281.82,2161.59 J1.1@2327.37,2177.99 ; 2281.82,2161.59 J1.1@2298.21,2207.14 ; 2281.82,2161.59 J1.1@2325.39,2182.68 ; 2281.82,2161.59 J1.1@2302.91,2205.16 ; 2281.82,2161.59 J1.1@2322.96,2187.11 ; 2281.82,2161.59 J1.1@2307.33,2202.73 ; 2281.82,2161.59 J1.1@2320.09,2191.23 ; 2281.82,2161.59 J1.1@2311.45,2199.87 ; 2281.82,2161.59 J1.1@2316.05,2195.82 ; 2281.82,2161.59 J1.1@2327.37,2177.99 ; 2281.82,2161.59 J1.1@2298.21,2207.14 ; 2281.82,2161.59 J1.1@2325.39,2182.68 ; 2281.82,2161.59 J1.1@2302.91,2205.16 ; 2281.82,2161.59 J1.1@2322.96,2187.11 ; 2281.82,2161.59 J1.1@2307.33,2202.73 ; 2281.82,2161.59 J1.1@2320.09,2191.23 ; 2281.82,2161.59 J1.1@2311.45,2199.87 ; 2281.82,2161.59 J1.1@2316.05,2195.82 ; 2281.82,2161.59 J1.1@2327.37,2177.99 ; 2281.82,2161.59 J1.1@2298.21,2207.14 ; 2281.82,2161.59 J1.1@2325.39,2182.68 ; 2281.82,2161.59 J1.1@2302.91,2205.16 ; 2281.82,2161.59 J1.1@2322.96,2187.11 ; 2281.82,2161.59 J1.1@2307.33,2202.73 ; 2281.82,2161.59 J1.1@2320.09,2191.23 ; 2281.82,2161.59 J1.1@2311.45,2199.87 ; 2281.82,2161.59 J1.1@2316.05,2195.82 ; 2281.82,2161.59 J1.1@2327.37,2177.99 ; 2281.82,2161.59 J1.1@2298.21,2207.14 ; 2281.82,2161.59 J1.1@2325.39,2182.68 ; 2281.82,2161.59 J1.1@2302.91,2205.16 ; 2281.82,2161.59 J1.1@2322.96,2187.11 ; 2281.82,2161.59 J1.1@2307.33,2202.73 ; 2281.82,2161.59 J1.1@2320.09,2191.23 ; 2281.82,2161.59 J1.1@2311.45,2199.87 ; 2281.82,2161.59 J1.1@2316.05,2195.82 ; 2281.82,2161.59 J1.1@2327.37,2177.99 ; 2281.82,2161.59 J1.1@2298.21,2207.14 ; 2281.82,2161.59 J1.1@2325.39,2182.68 ; 2281.82,2161.59 J1.1@2302.91,2205.16 ; 2281.82,2161.59 J1.1@2322.96,2187.11 ; 2281.82,2161.59 J1.1@2307.33,2202.73 ; 2281.82,2161.59 J1.1@2320.09,2191.23 ; 2281.82,2161.59 J1.1@2311.45,2199.87 ; 2281.82,2161.59 J1.1@2316.05,2195.82 ; 2281.82,2161.59 J1.1@2327.37,2177.99 ; 2281.82,2161.59 J1.1@2298.21,2207.14 ; 2281.82,2161.59 J1.1@2325.39,2182.68 ; 2281.82,2161.59 J1.1@2302.91,2205.16 ; 2281.82,2161.59 J1.1@2322.96,2187.11 ; 2281.82,2161.59 J1.1@2307.33,2202.73 ; 2281.82,2161.59 J1.1@2320.09,2191.23 ; 2281.82,2161.59 J1.1@2311.45,2199.87 ; 2281.82,2161.59 J1.1@2316.05,2195.82 ; 2281.82,2161.59 J1.1@2327.37,2177.99 ; 2281.82,2161.59 J1.1@2298.21,2207.14 ; 2281.82,2161.59 J1.1@2325.39,2182.68 ; 2281.82,2161.59 J1.1@2302.91,2205.16 ; 2281.82,2161.59 J1.1@2322.96,2187.11 ; 2281.82,2161.59 J1.1@2307.33,2202.73 ; 2281.82,2161.59 J1.1@2320.09,2191.23 ; 2281.82,2161.59 J1.1@2311.45,2199.87 ; 2281.82,2161.59 J1.1@2316.05,2195.82 ; 2281.82,2161.59 J1.1@2327.37,2177.99 ; 2281.82,2161.59 J1.1@2298.21,2207.14 ; 2281.82,2161.59 J1.1@2325.39,2182.68 ; 2281.82,2161.59 J1.1@2302.91,2205.16 ; 2281.82,2161.59 J1.1@2322.96,2187.11 ; 2281.82,2161.59 J1.1@2307.33,2202.73 ; 2281.82,2161.59 J1.1@2320.09,2191.23 ; 2281.82,2161.59 J1.1@2311.45,2199.87 ; 2281.82,2161.59 J1.1@2316.05,2195.82 ; 2281.82,2161.59 J1.1@2327.37,2177.99 ; 2281.82,2161.59 J1.1@2298.21,2207.14 ; 2281.82,2161.59 J1.1@2325.39,2182.68 ; 2281.82,2161.59 J1.1@2302.91,2205.16 ; 2281.82,2161.59 J1.1@2322.96,2187.11 ; 2281.82,2161.59 J1.1@2307.33,2202.73 ; 2281.82,2161.59 J1.1@2320.09,2191.23 ; 2281.82,2161.59 J1.1@2311.45,2199.87 ; 2281.82,2161.59 J1.1@2316.05,2195.82 ; 2281.82,2161.59 J1.1@2327.37,2177.99 ; 2281.82,2161.59 J1.1@2298.21,2207.14 ; 2281.82,2161.59 J1.1@2325.39,2182.68 ; 2281.82,2161.59 J1.1@2302.91,2205.16 ; 2281.82,2161.59 J1.1@2322.96,2187.11 ; 2281.82,2161.59 J1.1@2307.33,2202.73 ; 2281.82,2161.59 J1.1@2320.09,2191.23 ; 2281.82,2161.59 J1.1@2311.45,2199.87 ; 2281.82,2161.59 J1.1@2316.05,2195.82 ; 2281.82,2161.59 J1.1@2327.37,2177.99 ; 2281.82,2161.59 J1.1@2298.21,2207.14 ; 2281.82,2161.59 J1.1@2325.39,2182.68 ; 2281.82,2161.59 J1.1@2302.91,2205.16 ; 2281.82,2161.59 J1.1@2322.96,2187.11 ; 2281.82,2161.59 J1.1@2307.33,2202.73 ; 2281.82,2161.59 J1.1@2320.09,2191.23 ; 2281.82,2161.59 J1.1@2311.45,2199.87 ; 2281.82,2161.59 J1.1@2316.05,2195.82 ; 2281.82,2161.59 J1.1@2327.37,2177.99 ; 2281.82,2161.59 J1.1@2298.21,2207.14 ; 2281.82,2161.59 J1.1@2325.39,2182.68 ; 2281.82,2161.59 J1.1@2302.91,2205.16 ; 2281.82,2161.59 J1.1@2322.96,2187.11 ; 2281.82,2161.59 J1.1@2307.33,2202.73 ; 2281.82,2161.59 J1.1@2320.09,2191.23 ; 2281.82,2161.59 J1.1@2311.45,2199.87 ; 2281.82,2161.59 J1.1@2316.05,2195.82 ; 2281.82,2161.59 J1.1@2327.37,2177.99 ; 2281.82,2161.59 J1.1@2298.21,2207.14 ; 2281.82,2161.59 J1.1@2325.39,2182.68 ; 2281.82,2161.59 J1.1@2302.91,2205.16 ; 2281.82,2161.59 J1.1@2322.96,2187.11 ; 2281.82,2161.59 J1.1@2307.33,2202.73 ; 2281.82,2161.59 J1.1@2320.09,2191.23 ; 2281.82,2161.59 J1.1@2311.45,2199.87 ; 2281.82,2161.59 J1.1@2316.05,2195.82 ; 2281.82,2161.59 J1.1@2327.37,2177.99 ; 2281.82,2161.59 J1.1@2298.21,2207.14 ; 2281.82,2161.59 J1.1@2325.39,2182.68 ; 2281.82,2161.59 J1.1@2302.91,2205.16 ; 2281.82,2161.59 J1.1@2322.96,2187.11 ; 2281.82,2161.59 J1.1@2307.33,2202.73 ; 2281.82,2161.59 J1.1@2320.09,2191.23 ; 2281.82,2161.59 J1.1@2311.45,2199.87 ; 2281.82,2161.59 J1.1@2316.05,2195.82 ; 2281.82,2161.59 J1.1@2327.37,2177.99 ; 2281.82,2161.59 J1.1@2298.21,2207.14 ; 2281.82,2161.59 J1.1@2325.39,2182.68 ; 2281.82,2161.59 J1.1@2302.91,2205.16 ; 2281.82,2161.59 J1.1@2322.96,2187.11 ; 2281.82,2161.59 J1.1@2307.33,2202.73 ; 2281.82,2161.59 J1.1@2320.09,2191.23 ; 2281.82,2161.59 J1.1@2311.45,2199.87 ; 2281.82,2161.59 J1.1@2316.05,2195.82 ; 2281.82,2161.59 J1.1@2327.37,2177.99 ; 2281.82,2161.59 J1.1@2298.21,2207.14 ; 2281.82,2161.59 J1.1@2325.39,2182.68 ; 2281.82,2161.59 J1.1@2302.91,2205.16 ; 2281.82,2161.59 J1.1@2322.96,2187.11 ; 2281.82,2161.59 J1.1@2307.33,2202.73 ; 2281.82,2161.59 J1.1@2320.09,2191.23 ; 2281.82,2161.59 J1.1@2311.45,2199.87 ; 2281.82,2161.59 J1.1@2316.05,2195.82 ; 2281.82,2161.59 J1.1@2327.37,2177.99 ; 2281.82,2161.59 J1.1@2298.21,2207.14 ; 2281.82,2161.59 J1.1@2325.39,2182.68 ; 2281.82,2161.59 J1.1@2302.91,2205.16 ; 2281.82,2161.59 J1.1@2322.96,2187.11 ; 2281.82,2161.59 J1.1@2307.33,2202.73 ; 2281.82,2161.59 J1.1@2320.09,2191.23 ; 2281.82,2161.59 J1.1@2311.45,2199.87 ; 2281.82,2161.59 J1.1@2316.05,2195.82 ; 2281.82,2161.59 J1.1@2327.37,2177.99 ; 2281.82,2161.59 J1.1@2298.21,2207.14 ; 2281.82,2161.59 J1.1@2325.39,2182.68 ; 2281.82,2161.59 J1.1@2302.91,2205.16 ; 2281.82,2161.59 J1.1@2322.96,2187.11 ; 2281.82,2161.59 J1.1@2307.33,2202.73 ; 2281.82,2161.59 J1.1@2320.09,2191.23 ; 2281.82,2161.59 J1.1@2311.45,2199.87 ; 2281.82,2161.59 J1.1@2316.05,2195.82 ; 2281.82,2161.59 J1.1@2327.37,2177.99 ; 2281.82,2161.59 J1.1@2298.21,2207.14 ; 2281.82,2161.59 J1.1@2325.39,2182.68 ; 2281.82,2161.59 J1.1@2302.91,2205.16 ; 2281.82,2161.59 J1.1@2322.96,2187.11 ; 2281.82,2161.59 J1.1@2307.33,2202.73 ; 2281.82,2161.59 J1.1@2320.09,2191.23 ; 2281.82,2161.59 J1.1@2311.45,2199.87 ; 2281.82,2161.59 J1.1@2316.05,2195.82 ; 2281.82,2161.59 J1.1@2327.37,2177.99 ; 2281.82,2161.59 J1.1@2298.21,2207.14 ; 2281.82,2161.59 J1.1@2325.39,2182.68 ; 2281.82,2161.59 J1.1@2302.91,2205.16 ; 2281.82,2161.59 J1.1@2322.96,2187.11 ; 2281.82,2161.59 J1.1@2307.33,2202.73 ; 2281.82,2161.59 J1.1@2320.09,2191.23 ; 2281.82,2161.59 J1.1@2311.45,2199.87 ; 2281.82,2161.59 J1.1@2316.05,2195.82 ; 2281.82,2161.59 J1.1@2327.37,2177.99 ; 2281.82,2161.59 J1.1@2298.21,2207.14 ; 2281.82,2161.59 J1.1@2325.39,2182.68 ; 2281.82,2161.59 J1.1@2302.91,2205.16 ; 2281.82,2161.59 J1.1@2322.96,2187.11 ; 2281.82,2161.59 J1.1@2307.33,2202.73 ; 2281.82,2161.59 J1.1@2320.09,2191.23 ; 2281.82,2161.59 J1.1@2311.45,2199.87 ; 2281.82,2161.59 J1.1@2316.05,2195.82 ; 2281.82,2161.59 J1.1@2327.37,2177.99 ; 2281.82,2161.59 J1.1@2298.21,2207.14 ; 2281.82,2161.59 J1.1@2325.39,2182.68 ; 2281.82,2161.59 J1.1@2302.91,2205.16 ; 2281.82,2161.59 J1.1@2322.96,2187.11 ; 2281.82,2161.59 J1.1@2307.33,2202.73 ; 2281.82,2161.59 J1.1@2320.09,2191.23 ; 2281.82,2161.59 J1.1@2311.45,2199.87 ; 2281.82,2161.59 J1.1@2316.05,2195.82 ; 2281.82,2161.59 J1.1@2327.37,2177.99 ; 2281.82,2161.59 J1.1@2298.21,2207.14 ; 2281.82,2161.59 J1.1@2325.39,2182.68 ; 2281.82,2161.59 J1.1@2302.91,2205.16 ; 2281.82,2161.59 J1.1@2322.96,2187.11 ; 2281.82,2161.59 J1.1@2307.33,2202.73 ; 2281.82,2161.59 J1.1@2320.09,2191.23 ; 2281.82,2161.59 J1.1@2311.45,2199.87 ; 2281.82,2161.59 J1.1@2316.05,2195.82 ; 2281.82,2161.59 J1.1@2327.37,2177.99 ; 2281.82,2161.59 J1.1@2298.21,2207.14 ; 2281.82,2161.59 J1.1@2325.39,2182.68 ; 2281.82,2161.59 J1.1@2302.91,2205.16 ; 2281.82,2161.59 J1.1@2322.96,2187.11 ; 2281.82,2161.59 J1.1@2307.33,2202.73 ; 2281.82,2161.59 J1.1@2320.09,2191.23 ; 2281.82,2161.59 J1.1@2311.45,2199.87 ; 2281.82,2161.59 J1.1@2316.05,2195.82 ; 2281.82,2161.59 J1.1@2327.37,2177.99 ; 2281.82,2161.59 J1.1@2298.21,2207.14 ; 2281.82,2161.59 J1.1@2325.39,2182.68 ; 2281.82,2161.59 J1.1@2302.91,2205.16 ; 2281.82,2161.59 J1.1@2322.96,2187.11 ; 2281.82,2161.59 J1.1@2307.33,2202.73 ; 2281.82,2161.59 J1.1@2320.09,2191.23 ; 2281.82,2161.59 J1.1@2311.45,2199.87 ; 2281.82,2161.59 J1.1@2316.05,2195.82 ; 2281.82,2161.59 J1.1@2327.37,2177.99 ; 2281.82,2161.59 J1.1@2298.21,2207.14 ; 2281.82,2161.59 J1.1@2325.39,2182.68 ; 2281.82,2161.59 J1.1@2302.91,2205.16 ; 2281.82,2161.59 J1.1@2322.96,2187.11 ; 2281.82,2161.59 J1.1@2307.33,2202.73 ; 2281.82,2161.59 J1.1@2320.09,2191.23 ; 2281.82,2161.59 J1.1@2311.45,2199.87 ; 2281.82,2161.59 J1.1@2316.05,2195.82 ; 2281.82,2161.59 J1.1@2327.37,2177.99 ; 2281.82,2161.59 J1.1@2298.21,2207.14 ; 2281.82,2161.59 J1.1@2325.39,2182.68 ; 2281.82,2161.59 J1.1@2302.91,2205.16 ; 2281.82,2161.59 J1.1@2322.96,2187.11 ; 2281.82,2161.59 J1.1@2307.33,2202.73 ; 2281.82,2161.59 J1.1@2320.09,2191.23 ; 2281.82,2161.59 J1.1@2311.45,2199.87 ; 2281.82,2161.59 J1.1@2316.05,2195.82 ; 2281.82,2161.59 J1.1@2327.37,2177.99 ; 2281.82,2161.59 J1.1@2298.21,2207.14 ; 2281.82,2161.59 J1.1@2325.39,2182.68 ; 2281.82,2161.59 J1.1@2302.91,2205.16 ; 2281.82,2161.59 J1.1@2322.96,2187.11 ; 2281.82,2161.59 J1.1@2307.33,2202.73 ; 2281.82,2161.59 J1.1@2320.09,2191.23 ; 2281.82,2161.59 J1.1@2311.45,2199.87 ; 2281.82,2161.59 J1.1@2316.05,2195.82 ; 2281.82,2161.59 J1.1@2327.37,2177.99 ; 2281.82,2161.59 J1.1@2298.21,2207.14 ; 2281.82,2161.59 J1.1@2325.39,2182.68 ; 2281.82,2161.59 J1.1@2302.91,2205.16 ; 2281.82,2161.59 J1.1@2322.96,2187.11 ; 2281.82,2161.59 J1.1@2307.33,2202.73 ; 2281.82,2161.59 J1.1@2320.09,2191.23 ; 2281.82,2161.59 J1.1@2311.45,2199.87 ; 2281.82,2161.59 J1.1@2316.05,2195.82 ; 2281.82,2161.59 J1.1@2327.37,2177.99 ; 2281.82,2161.59 J1.1@2298.21,2207.14 ; 2281.82,2161.59 J1.1@2325.39,2182.68 ; 2281.82,2161.59 J1.1@2302.91,2205.16 ; 2281.82,2161.59 J1.1@2322.96,2187.11 ; 2281.82,2161.59 J1.1@2307.33,2202.73 ; 2281.82,2161.59 J1.1@2320.09,2191.23 ; 2281.82,2161.59 J1.1@2311.45,2199.87 ; 2281.82,2161.59 J1.1@2316.05,2195.82 ; 2281.82,2161.59 J1.1@2327.37,2177.99 ; 2281.82,2161.59 J1.1@2298.21,2207.14 ; 2281.82,2161.59 J1.1@2325.39,2182.68 ; 2281.82,2161.59 J1.1@2302.91,2205.16 ; 2281.82,2161.59 J1.1@2322.96,2187.11 ; 2281.82,2161.59 J1.1@2307.33,2202.73 ; 2281.82,2161.59 J1.1@2320.09,2191.23 ; 2281.82,2161.59 J1.1@2311.45,2199.87 ; 2281.82,2161.59 J1.1@2316.05,2195.82 ; 2281.82,2161.59 J1.1@2327.37,2177.99 ; 2281.82,2161.59 J1.1@2298.21,2207.14 ; 2281.82,2161.59 J1.1@2325.39,2182.68 ; 2281.82,2161.59 J1.1@2302.91,2205.16 ; 2281.82,2161.59 J1.1@2322.96,2187.11 ; 2281.82,2161.59 J1.1@2307.33,2202.73 ; 2281.82,2161.59 J1.1@2320.09,2191.23 ; 2281.82,2161.59 J1.1@2311.45,2199.87 ; 2281.82,2161.59 J1.1@2316.05,2195.82 ; 2281.82,2161.59 J1.1@2327.37,2177.99 ; 2281.82,2161.59 J1.1@2298.21,2207.14 ; 2281.82,2161.59 J1.1@2325.39,2182.68 ; 2281.82,2161.59 J1.1@2302.91,2205.16 ; 2281.82,2161.59 J1.1@2322.96,2187.11 ; 2281.82,2161.59 J1.1@2307.33,2202.73 ; 2281.82,2161.59 J1.1@2320.09,2191.23 ; 2281.82,2161.59 J1.1@2311.45,2199.87 ; 2281.82,2161.59 J1.1@2316.05,2195.82 ; 2281.82,2161.59 J1.1@2327.37,2177.99 ; 2281.82,2161.59 J1.1@2298.21,2207.14 ; 2281.82,2161.59 J1.1@2325.39,2182.68 ; 2281.82,2161.59 J1.1@2302.91,2205.16 ; 2281.82,2161.59 J1.1@2322.96,2187.11 ; 2281.82,2161.59 J1.1@2307.33,2202.73 ; 2281.82,2161.59 J1.1@2320.09,2191.23 ; 2281.82,2161.59 J1.1@2311.45,2199.87 ; 2281.82,2161.59 J1.1@2316.05,2195.82 ; 2281.82,2161.59 J1.1@2327.37,2177.99 ; 2281.82,2161.59 J1.1@2298.21,2207.14 ; 2281.82,2161.59 J1.1@2325.39,2182.68 ; 2281.82,2161.59 J1.1@2302.91,2205.16 ; 2281.82,2161.59 J1.1@2322.96,2187.11 ; 2281.82,2161.59 J1.1@2307.33,2202.73 ; 2281.82,2161.59 J1.1@2320.09,2191.23 ; 2281.82,2161.59 J1.1@2311.45,2199.87 ; 2281.82,2161.59 J1.1@2316.05,2195.82 ; 2281.82,2161.59 J1.1@2327.37,2177.99 ; 2281.82,2161.59 J1.1@2298.21,2207.14 ; 2281.82,2161.59 J1.1@2325.39,2182.68 ; 2281.82,2161.59 J1.1@2302.91,2205.16 ; 2281.82,2161.59 J1.1@2322.96,2187.11 ; 2281.82,2161.59 J1.1@2307.33,2202.73 ; 2281.82,2161.59 J1.1@2320.09,2191.23 ; 2281.82,2161.59 J1.1@2311.45,2199.87 ; 2281.82,2161.59 J1.1@2316.05,2195.82 ; J1.1@2316.05,2195.82 2262,2141.77 2262,1963 2361,1864 3329,1864 3402.9,1937.9
PWREN: TP1.1 U1.J12 | length 307.1
  Top Layer w5: U1.J12@2840.89,2669.02 ccw(c2840.89,2681.99) 2850.06,2672.82 ccw(c2859.23,2663.65) U1.J12@2846.26,2663.65 ; 2846.84,2669.6 ccw(c2837.04,2679.4) v1@2850.9,2679.4 ; 2847.42,2670.18 cw(c2856.4,2661.2) v1@2856.4,2673.9 ; v1@2851.36,2681.59 U1.J12@2845.12,2660.34 ; v1@2852.03,2682.74 U1.J12@2840.89,2663.65 ; v1@2852.97,2683.7 U1.J12@2837.58,2667.88 ; v1@2856.91,2679.67 v1@2856.52,2679.28 ; v1@2858.66,2674.39 U1.J12@2837.58,2667.88 ; v1@2859.81,2675.08 U1.J12@2840.89,2663.65 ; v1@2860.75,2676.03 U1.J12@2845.12,2660.34 ; U1.J12@2837.58,2667.88 v1@2856.52,2679.28 ; U1.J12@2837.58,2667.88 v1(2856.4,2679.4) ; U1.J12@2840.89,2663.65 v1@2856.52,2679.28 ; U1.J12@2840.89,2663.65 v1(2856.4,2679.4) ; U1.J12@2845.12,2660.34 v1@2856.52,2679.28 ; U1.J12@2845.12,2660.34 v1(2856.4,2679.4)
RNB: R6.2 U1.G6 U2.7 | length 1341.9
  Top Layer w5: U1.G6@2903.88,2858 ccw(c2903.88,2870.97) 2913.05,2861.8 ccw(c2922.23,2852.62) U1.G6@2909.25,2852.62 ; v1@2913.76,2868 cw(c2900.48,2868) 2909.87,2858.61 cw(c2919.26,2849.22) v1@2919.26,2862.5 ; v1@2914.21,2870.2 U1.G6@2908.12,2849.32 ; v1@2914.91,2871.37 U1.G6@2903.88,2852.62 ; v1@2915.86,2872.33 U1.G6@2900.58,2856.86 ; v1@2921.45,2862.96 U1.G6@2900.58,2856.86 ; v1@2922.62,2863.65 U1.G6@2903.88,2852.62 ; v1@2923.59,2864.61 U1.G6@2908.12,2849.32 ; v1@3079.11,3393.33 3098.6,3405.1 ; v1(3082.5,3389) 3098.6,3405.1 ; v1@3082.5,3394.5 ccw(c3082.5,3407.78) 3091.89,3398.39 ccw(c3101.28,3389) v1@3088,3389 ; v1@3086.83,3385.61 3098.6,3405.1 ; 3202.2,3405.1 U2.7@3222.13,3405.1 ; U2.7@3220.41,3403.39 ccw(c3216.28,3399.25) 3216.28,3405.1 ccw(c3216.28,3410.94) U2.7@3220.41,3406.81 ; U2.7@3240.83,3405.1 3098.6,3405.1 ; U1.G6@2900.58,2856.86 v1(2919.26,2868) ; U1.G6@2900.58,2856.86 v1(2919.26,2868) ; U1.G6@2903.88,2852.62 v1(2919.26,2868) ; U1.G6@2903.88,2852.62 v1(2919.26,2868) ; U1.G6@2908.12,2849.32 v1(2919.26,2868) ; U1.G6@2908.12,2849.32 v1(2919.26,2868)
  SIGNAL_1 w5: v1@2913.76,2868 ccw(c2900.48,2868) 2909.87,2877.39 ccw(c2919.26,2886.78) v1@2919.26,2873.5 ; v1@2914.92,2864.62 2903.5,2883.76 ; v1@2922.64,2872.34 2903.5,2883.76 ; v1@3077.04,3388.34 3082.5,3366 ; v1@3078.61,3385.11 cw(c3069.22,3375.72) 3082.5,3375.72 cw(c3095.78,3375.72) v1@3086.39,3385.11 ; v1@3087.96,3388.34 3082.5,3366 ; 2903.5,2883.76 v1(2919.26,2868) 2903.5,2883.76 ; 2903.5,2883.76 2903.5,3019.58 2904,3020.08 2904,3166.08 3082.5,3344.58 v1(3082.5,3389) 3082.5,3366
RXD0: pad.PA52 U1.K14 | length 1981.7
  Top Layer w5: U1.K14@2809.39,2606.03 ccw(c2809.39,2619) 2818.56,2609.83 ccw(c2827.74,2600.65) U1.K14@2814.76,2600.65 ; 2815.09,2606.35 ccw(c2804.45,2617) v1@2819.5,2617 ; 2816.87,2608.13 cw(c2825,2600) v1@2825,2611.5 ; v1@2819.94,2619.16 U1.K14@2813.62,2597.34 ; v1@2820.59,2620.29 U1.K14@2809.39,2600.65 ; v1@2821.49,2621.23 U1.K14@2806.08,2604.89 ; v1@2827.38,2612.04 U1.K14@2806.08,2604.89 ; v1@2828.49,2612.75 U1.K14@2809.39,2600.65 ; v1@2829.39,2613.69 U1.K14@2813.62,2597.34 ; U1.K14@2806.08,2604.89 v1@2825,2616.26 ; U1.K14@2806.08,2604.89 v1(2825,2617) ; U1.K14@2809.39,2600.65 v1@2825,2616.26 ; U1.K14@2809.39,2600.65 v1(2825,2617) ; U1.K14@2813.62,2597.34 v1@2825,2616.26 ; U1.K14@2813.62,2597.34 v1(2825,2617) ; v1@2825,2616.26 v1(2825,2617)
  SIGNAL_1 w5: pad.PA52@2367.96,2006.15 2413.5,2022.54 ; pad.PA52@2369.93,2001.46 2413.5,2022.54 ; pad.PA52@2372.37,1997.03 2413.5,2022.54 ; pad.PA52@2375.23,1992.91 2413.5,2022.54 ; pad.PA52@2379.28,1988.32 2424,2033.04 ; pad.PA52@2379.28,1999.44 ccw(c2379.28,2026.29) 2398.26,2007.3 ccw(c2417.25,1988.32) pad.PA52@2390.4,1988.32 ; pad.PA52@2379.28,2004.44 ccw(c2379.28,2043.36) 2406.8,2015.84 ccw(c2434.32,1988.32) pad.PA52@2395.4,1988.32 ; pad.PA52@2379.28,2009.44 ccw(c2379.28,2060.43) 2415.33,2024.37 ccw(c2451.39,1988.32) pad.PA52@2400.4,1988.32 ; pad.PA52@2383.87,1984.27 2413.5,2022.54 ; pad.PA52@2387.99,1981.41 2413.5,2022.54 ; pad.PA52@2392.42,1978.97 2413.5,2022.54 ; pad.PA52@2397.11,1977 2413.5,2022.54 ; 2424,2090.24 2424,2033.04 ; v1@2819.5,2617 cw(c2806.22,2617) 2815.61,2607.61 cw(c2825,2598.22) v1@2825,2611.5 ; v1@2820.67,2620.39 2809,2601 ; v1@2828.39,2612.67 2809,2601 ; 2424,2033.04 2424,2279.93 2531.07,2387 2770.42,2387 2793.5,2410.08 2793.5,2525.5 2809,2541 2809,2601 ; 2809,2601 v1(2825,2617) 2809,2601
RXD1: pad.PA50 U1.K17 | length 1559.3
  Top Layer w5: U1.K17@2804.04,2505.62 2809,2483.28 ; U1.K17@2805.59,2502.36 cw(c2797.36,2494.13) 2809,2494.13 ; 2809,2492.25 cw(c2823.31,2492.25) U1.K17@2813.19,2502.36 ; U1.K17@2814.72,2505.44 2809,2483.28 ; v1@2818.54,2373.66 2824,2396 v1@2829.46,2373.66 ; v1@2820.11,2376.89 ccw(c2810.72,2386.28) 2824,2386.28 ccw(c2837.28,2386.28) v1@2827.89,2376.89 ; v1(2824,2373) 2824,2434.5 2809,2449.5 2809,2505.77 U1.K17@2809.39,2506.16 2809,2483.28
  SIGNAL_1 w5: pad.PA50@2446.73,2006.17 2492,2022.3 ; pad.PA50@2448.69,2001.47 2492,2022.3 ; pad.PA50@2451.11,1997.04 2492,2022.3 ; pad.PA50@2453.97,1992.91 2492,2022.3 ; pad.PA50@2458.02,1988.32 2492,2022.3 ; pad.PA50@2458.49,1999.43 ccw(c2459.49,2022.63) 2475.91,2006.21 ccw(c2492.33,1989.79) pad.PA50@2469.13,1988.79 ; pad.PA50@2458.71,2004.42 ccw(c2460.15,2038.06) 2483.95,2014.25 ccw(c2507.76,1990.45) pad.PA50@2474.12,1989.01 ; pad.PA50@2458.92,2009.42 ccw(c2460.81,2053.49) 2492,2022.3 ; pad.PA50@2462.61,1984.27 2492,2022.3 ; pad.PA50@2466.74,1981.41 2492,2022.3 ; pad.PA50@2471.17,1978.99 2492,2022.3 ; pad.PA50@2475.87,1977.03 2492,2022.3 ; pad.PA50@2479.12,1989.22 cw(c2523.19,1991.11) 2492,2022.3 ; 2811.06,2362.14 cw(c2824,2349.2) v1@2824,2367.5 ; 2816.08,2367.16 ccw(c2810.24,2373) v1@2818.5,2373 ; v1(2824,2373) 2821.92,2373 2805.92,2357 2543.5,2357 2492,2305.5 2492,2022.3